# Altium PCB STC32F_Control6.25.PcbDoc
Units mil, origin at the board's own origin, x right, y up, seen from the top; angles counter-clockwise.
Board outline 3897 x 2975.69 mil, 2 copper layers (Top Layer, Bottom Layer); 76 components, 64 nets, 254 pads, 70 vias.
Unrouted connection lines stored in the file: 42.
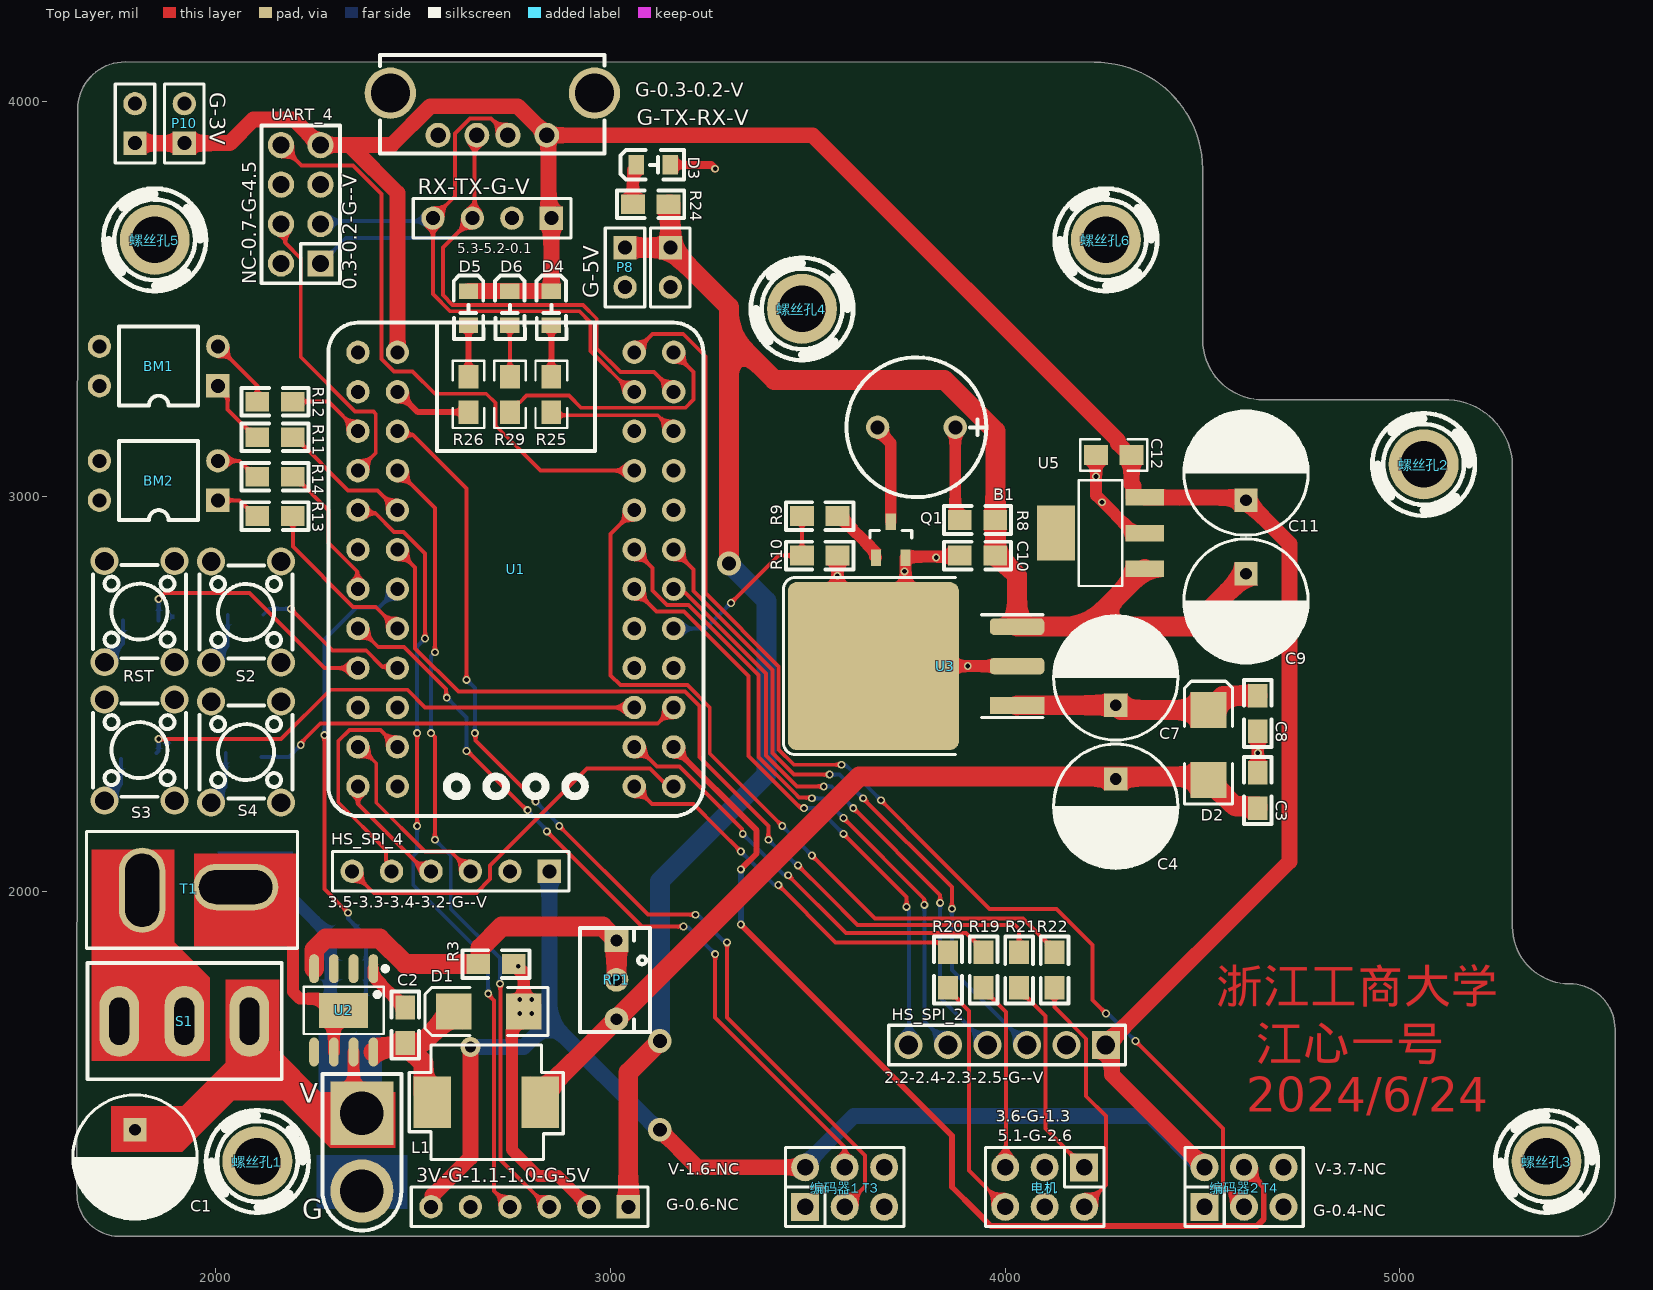
[diagram p0: Top Layer view]
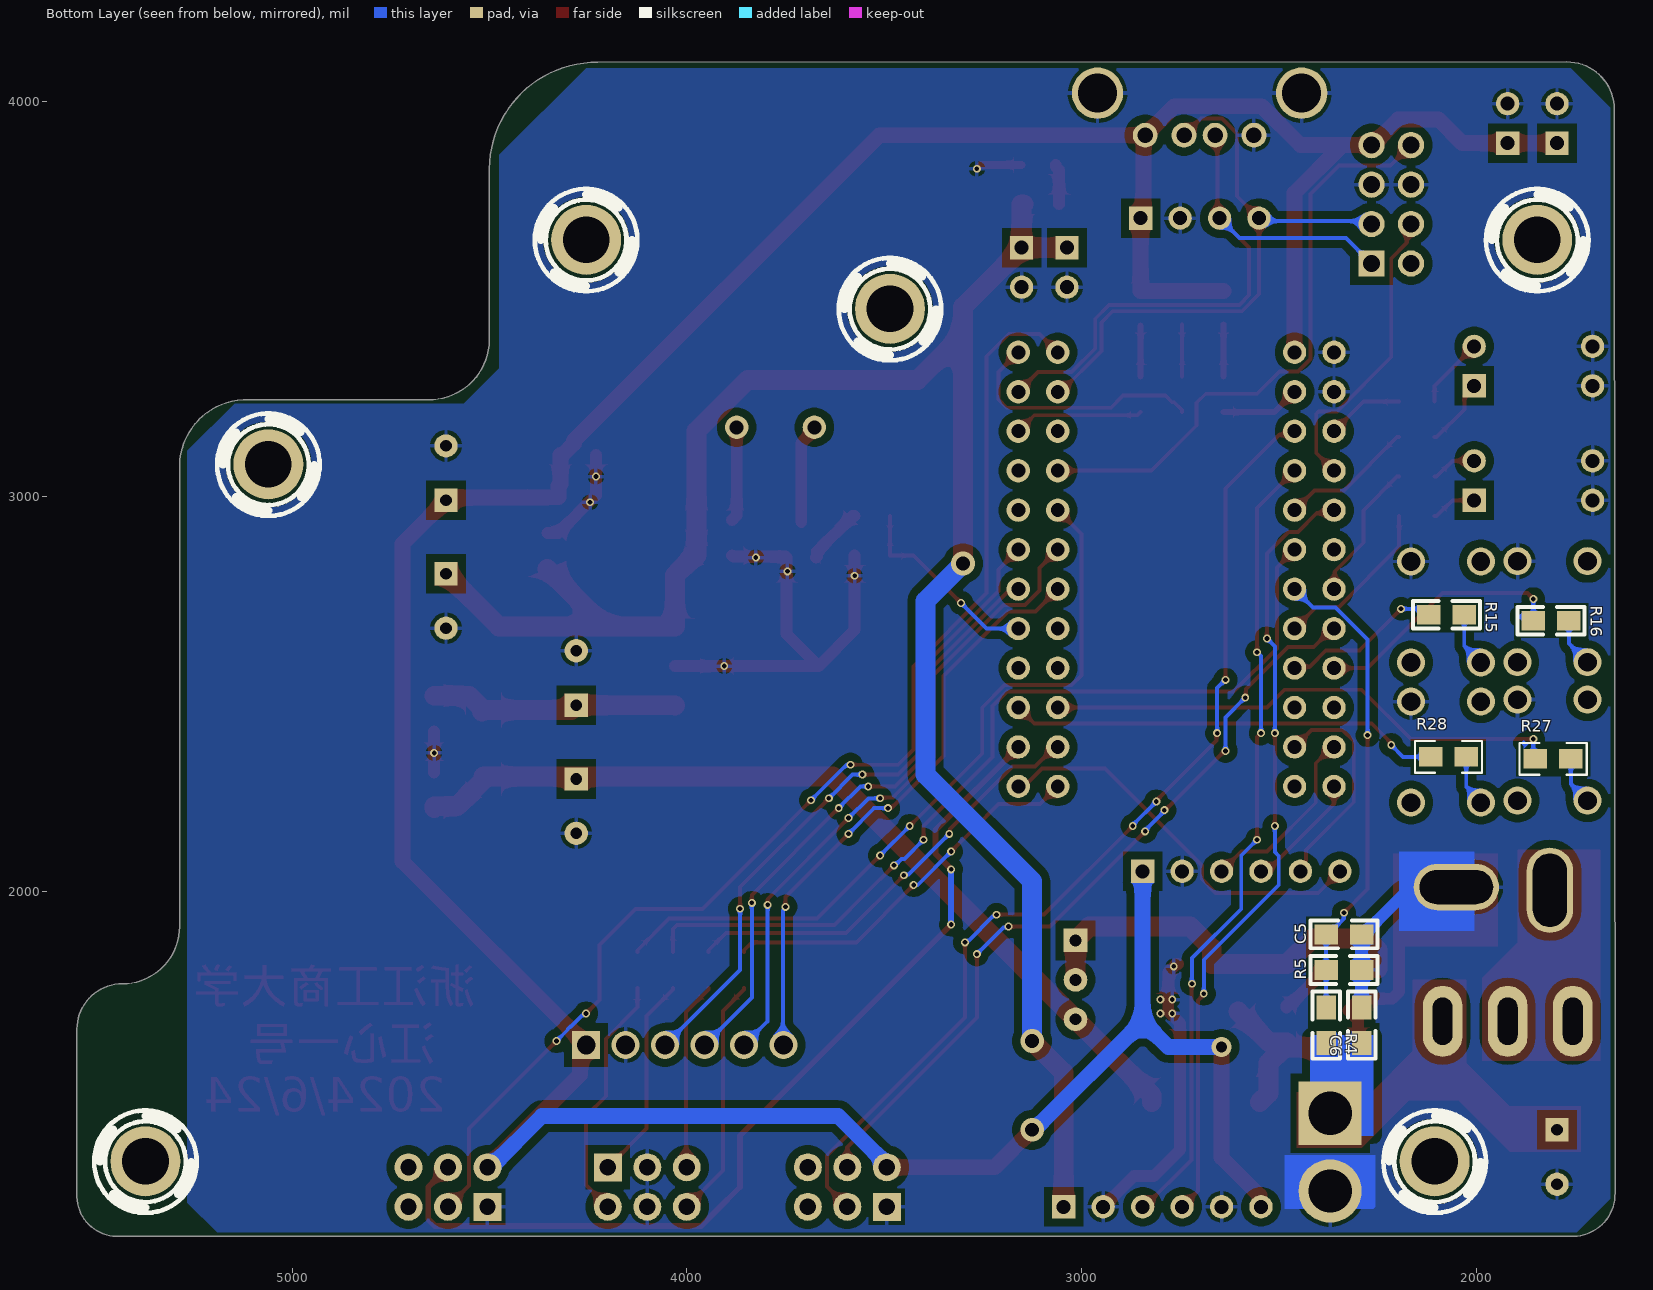
[diagram p1: Bottom Layer view, seen from below]

## Layer stack, top to bottom
Top Solder: solder mask 0.4, Solder Resist, Dk 3.5
Top Layer: signal copper 1.4
Dielectric 1: dielectric 12.6, FR-4, Dk 4.8
Bottom Layer: signal copper 1.4
Bottom Solder: solder mask 0.4, Solder Resist, Dk 3.5

## Board outline
1648,1234.93 ccw(c1755,1232.15) 1753.13,1125.13 1755,1125 5450,1125 5445,1125 ccw(c5442.5,1227.5) 5545,1225 5545,1650 ccw(c5430,1650) 5430,1765 cw(c5430,1910) 5285,1910 5285.14,1910 5285,3080 ccw(c5115,3075) 5110,3245 4655,3245 cw(c4652.5,3397.5) 4500,3395 4500,3830 ccw(c4227.5,3827.5) 4225.85,4100.01 4225,4099.63 1770,4100.69 1770,4100.59 ccw(c1769.5,3981.09) 1650,3980.59 1650.21,3980

## Design rules (kind name [scope] priority, off if disabled: settings)
Clearance [All] p1: gap=6 ignorepadtopadclearanceinfootprint=TRUE
HoleSize [All] p1: absolutevalues=TRUE maxlimit=393.7 minlimit=1 maxpercent=80.000 minpercent=20.000
PolygonConnect [All] p1: connectstyle=Relief reliefconductorwidth=10 reliefentries=4 polygonreliefangle="90 Angle" airgapwidth=10
RoutingVias [All] p1: holewidth=28 width=50 viastyle="Through Hole" minholewidth=28 minwidth=50 maxholewidth=28 maxwidth=50
SolderMaskExpansion [All] p1: expansion=4 istentingtop=FALSE
Width Width_1 [InNetClass('POWER')] p1: maxlimit=80 minlimit=10 preferedwidth=40
Width [InNetClass('POWER')] p2: maxlimit=100 minlimit=10 preferedwidth=30
29 further rules are at their usual default settings.

## Components (designator, comment, footprint, x,y, rotation, side; value= is the part's Value field where it differs from the comment)
3V-G-1.1-1.0-G-5V "Header 6" HDR1X6 3045,1200 r180 top (schematic designator P6)
B1 "BEEP" "BEEP 9x5.5mm" 3775,3175 r180 top
BM1 "SW DIP-2" BoMa2 1845,3340 r90 top
BM2 "SW DIP-2" BoMa2 1845,3050 r90 top
C1 "Cap Pol2" CAP-8X9 1795,1326.1 r270 top value=220uF
C2 "102" 0805#1 2480,1705 r270 top value=1000pF
C3 "104" 0805#1 4640,2300 r270 top value=1000pF
C4 "Cap Pol2" CAP-8X9 4280,2215 r270 top value=470uF
C5 "100nF" 0805#1 2290,1890 r0 bottom
C6 "104" 0805#1 2290,1705 r270 bottom value=1000pF
C7 "100uF 16V" CAP-8X9 4280,2540 r90 top value=100uF
C8 "100nF" 0805#1 4640,2495 r270 top
C9 "100uF 16V" CAP-8X9 4610,2735 r270 top value=100uF
C10 "100nF" 0805#1 3975,2850 r180 top
C11 "Cap Pol2" CAP-8X9 4610,3058.9 r90 top value=220uF
C12 "104" 0805#2 4275,3105 r0 top value=1000pF
D1 "SS56" SMB 2691.42,1695 r180 top
D2 "SS54" SMB 4515,2370 r90 top
D3 "LED5V" "LED 0805紫光二极管" 3105.63,3837.6 r0 top
D4 "LED5V" "LED 0805紫光二极管" 2847.6,3479.37 r270 top
D5 "LED5V" "LED 0805紫光二极管" 2637.6,3479.37 r270 top
D6 "LED5V" "LED 0805紫光二极管" 2742.6,3479.37 r270 top
G "电机供电接口" XT30 2370,1436.85 r270 top (schematic designator P1)
G-3V "3.3V" HDR1X2 1795,3895 r90 top (schematic designator P9)
G-5V "Header 2" HDR1X2 3151.61,3630 r270 top (schematic designator P7)
G-TX-RX-V "USB-231-ARY" TYPE-A 2441.97,4021.69 r0 top (schematic designator U4)
HS_SPI_2 "CON6" 6P2.54 4005,1610 r180 top
HS_SPI_4 "Header 6" HDR1X6 2845,2050 r180 top
L1 "Inductor" SMD 2685,1465 r0 top value=22mH
P8 "Header 2" HDR1X2 3036.61,3630 r270 top
P10 "3.3V" HDR1X2 1920,3895 r90 top
Q1 "S8050" S8050 3710,2885 r90 top
R3 "2K" 0805#1 2665,1815 r0 top
R4 "200K ±1%" 0805#1 2380,1615 r90 bottom value=200K
R5 "20K ±1%" 0805#1 2380,1800 r180 bottom value=20K
R8 "10R ±1%" 0805#1 3975,2940 r180 top value=10R
R9 "4.7K ±1%" 0805#1 3485,2950 r0 top value=4.7K
R10 "200K ±1%" 0805#1 3485,2850 r0 top value=200K
R11 "470R ±1%" 0805#1 2195,3150 r180 top value=470R
R12 "470R ±1%" 0805#1 2195,3240 r180 top value=470R
R13 "470R ±1%" 0805#1 2195,2950 r180 top value=470R
R14 "470R ±1%" 0805#1 2195,3050 r180 top value=470R
R15 "470R ±1%" 0805#1 2120,2700 r180 bottom value=470R
R16 "470R ±1%" 0805#1 1855,2685 r180 bottom value=470R
R19 "100R ±1%" 0805#1 3945,1845 r270 top value=100R
R20 "100R ±1%" 0805#1 3855,1845 r270 top value=100R
R21 "100R ±1%" 0805#1 4035,1755 r90 top value=100R
R22 "100R ±1%" 0805#1 4125,1755 r90 top value=100R
R24 "2K ±1%" 0805#1 3146.61,3740 r180 top value=2K
R25 "2K ±1%" 0805#2 2850,3258.39 r90 top value=2K
R26 "2K ±1%" 0805#2 2640,3258.39 r90 top value=2K
R27 "470R ±1%" 0805#2 1805,2335 r180 bottom value=470R
R28 "470R ±1%" 0805#2 2070,2340 r180 bottom value=470R
R29 "2K ±1%" 0805#2 2745,3258.39 r90 top value=2K
RP1 "10kΩ" 可调电阻10k 3015,1775 r0 top
RST "TS665CJ" 圆形按键 1895,2580 r90 top
RX-TX-G-V "Header 4" HDR1X4 2850,3705 r180 top (schematic designator P5)
S1 "ON/OFF" KAIGUAN-N 1920,1670 r180 top
S2 "TS665CJ" 圆形按键 2165,2579.11 r90 top
S3 "TS665CJ" 圆形按键 1895,2229.11 r90 top
S4 "TS665CJ" 圆形按键 2165,2224.11 r90 top
T1 "XT30插头" T插头 1813,2002 r0 top
U1 "STC32F_48P_CoreBoard" STC32F_48P 2760,2815 r0 top
U2 "TPS5430DDA" TPS5430DDA. 2350,1690 r180 top
U3 "SPX2940-5.0" SPX2940-5.0 3745.98,2565 r90 top
U5 "LM39100S-3.3" LM39100 4245,2895 r0 top
UART_4 "IDC4" 2X4P2.54 2215,3740 r90 top
电机 "Header 3X2" 2X3P2.54 4100,1250 r180 top
"编码器1 T3" "Header 3X2" 2X3P2.54 3593.15,1250 r0 top
"编码器2 T4" "Header 3X2" 2X3P2.54 4605,1250 r0 top
螺丝孔1 "Scrow" LQ_SCROW3_5mm 2105,1315 r0 top
螺丝孔2 "Scrow" LQ_SCROW3_5mm 5060,3081 r0 top
螺丝孔3 "Scrow" LQ_SCROW3_5mm 5371.46,1315 r0 top
螺丝孔4 "Scrow" LQ_SCROW3_5mm 3485,3475 r0 top
螺丝孔5 "Scrow" LQ_SCROW3_5mm 1845,3650 r0 top
螺丝孔6 "Scrow" LQ_SCROW3_5mm 4255,3650 r0 top

## Footprints (in the part's own frame and the unit in brackets; to place one, negate y for a bottom-side part, rotate by r counter-clockwise, add the part's x,y. Pads: shape width x height; smd on the part's side, far side on the other; paste and mask are expansions set on the pad)
2X3P2.54 [mm]
  rect 1.8x1.8 hole 1.05: 1(-2.54,-1.27)
  round 1.8 hole 1.05: 2(-2.54,1.27) 3(0,-1.27) 4(0,1.27) 5(2.54,-1.27) 6(2.54,1.27)
  silkscreen extent -3.81,-2.54 3.81,2.54
2X4P2.54 [mm]
  rect 1.7x1.7 hole 1.1: 1(-3.81,-1.27)
  round 1.7 hole 1.1: 2(-3.81,1.27) 3(-1.27,-1.27) 4(-1.27,1.27) 5(1.27,-1.27) 6(1.27,1.27) 7(3.81,-1.27) 8(3.81,1.27)
  silkscreen extent -5.08,-2.54 5.08,2.54
6P2.54 [mm]
  rect 1.8x1.8 hole 1.2: 1(-6.35,0)
  round 1.8 hole 1.2: 2(-3.81,0) 3(-1.27,0) 4(1.27,0) 5(3.81,0) 6(6.35,0)
  silkscreen extent -7.62,-1.27 7.62,1.27
0805#1 [mil]
  rect 60x50 smd: 1(0,0) 2(90,0)
  silkscreen extent -40,-35 130,35
0805#2 [mil]
  rect 60x50 smd: 1(-45,0) 2(45,0)
  silkscreen extent -85,-40 85,40
"BEEP 9x5.5mm" [mm] "蜂鸣器 9x5.5mm"
  round 1.5 hole 0.9: 1(-2.5,0) 2(2.5,0)
  silkscreen extent -4.5,-4.5 4.5,4.5, body extent -4.8,-4.8 4.8,4.8, height 5.05
BoMa2 [mm]
  rect 1.5x1.5 hole 0.9: 1(-1.524,-4.064)
  round 1.5 hole 0.9: 2(1.016,-4.064) 3(1.016,3.556) 4(-1.524,3.556)
  silkscreen extent -2.79,-2.79 2.29,2.29, body extent -3.52,-5.2 3.02,4.7, height 6.8
CAP-8X9 [mm]
  rect 1.5x1.5 hole 0.75: 1(-1.75,0)
  round 1.5 hole 0.75: 2(1.75,0)
  silkscreen extent -4,-4 4,4, body extent -4,-3.99 4,3.99, height 9.8
HDR1X2 [mm] "Connector; Header; 2 Position"
  rect 1.5x1.5 hole 0.9: 1(0,0)
  round 1.5 hole 0.9: 2(2.54,0)
  silkscreen extent -1.27,-1.27 3.81,1.27
HDR1X4 [mm] "Connector; Header; 4 Position"
  rect 1.5x1.5 hole 0.9: 1(0,0)
  round 1.5 hole 0.9: 2(2.54,0) 3(5.08,0) 4(7.62,0)
  silkscreen extent -1.27,-1.27 8.89,1.27
HDR1X6 [mm] "Connector; Header; 6 Position"
  rect 1.5x1.5 hole 0.9: 1(0,0)
  round 1.5 hole 0.9: 2(2.54,0) 3(5.08,0) 4(7.62,0) 5(10.16,0) 6(12.7,0)
  silkscreen extent -1.27,-1.27 13.97,1.27
KAIGUAN-N [mil]
  oval 100x180 hole 120 slot 50 at 0 deg: 1(-165,0) 2(0,0) 3(165,0)
  silkscreen extent -247,-148 245,147
"LED 0805紫光二极管" [mm]
  rect 1x1.25 smd: 1(-1.032,0.061) 2(1.168,0.061)
  silkscreen extent -2.03,-0.89 2.05,1.02
LM39100 [mm]
  rect 2.465x1.05 smd: 1(2.756,-1.998) 2(2.756,0.302) 3(2.756,2.602)
  rect 2.465x3.54 smd: 4(-2.959,0.302)
  silkscreen extent -1.5,-3.1 1.3,3.7
LQ_SCROW3_5mm [mm]
  round 4.5 hole 3: 1(0,0)
  silkscreen extent -3.3,-3.3 3.3,3.3, body extent -3,-3 3,3, height 1.3
S8050 [mm]
  rect 1.05x0.65 smd: 1(-1.023,0.95) 2(-1.023,-0.95) 3(1.277,0)
  silkscreen extent 0.25,-1.35 0.71,1.35, body extent -1.27,-1.45 1.53,1.45, height 1.2
SMB [mm] "DO-214-AA/SMB; 2 C-Bend Leads; Body 5.3 x 3.6 mm, inc. leads (LxW)"
  rect 2.3x2.3 smd: 1(-2.25,0) 2(2.25,0)
  silkscreen extent -3.8,-1.55 4.1,1.55
SMD [mm] "DO-214-AB/SMC; 2 C-Bend Leads; Body 7.9 x 5.9 mm, inc. leads (LxW)"
  rect 2.4x3.3 smd: 1(-3.475,0) 2(3.475,0)
  silkscreen extent -4.95,-3.68 4.95,3.68
SPX2940-5.0 [mm]
  rect 1.07x3.5 smd: 1(-2.413,-7.214)
  rrect10% 10.8x11 smd: 2(0.127,2.032)
  rrect50% 1.07x3.5 smd: 2(0.127,-7.214) 3(2.667,-7.214)
  silkscreen extent -5.57,-8.87 5.83,7.82, body extent -4.95,-7.98 5.21,6.25, height 4.87
STC32F_48P [mm] "核心板"
  round 1.5 hole 0.9: 1(-10.16,13.97) 2(-7.62,13.97) 3(-10.16,11.43) 4(-7.62,11.43) 5(-10.16,8.89) 6(-7.62,8.89) 7(-10.16,6.35) 8(-7.62,6.35) 9(-10.16,3.81) 10(-7.62,3.81) 11(-10.16,1.27) 12(-7.62,1.27) 13(-10.16,-1.27) 14(-7.62,-1.27) 15(-10.16,-3.81) 16(-7.62,-3.81) 17(-10.16,-6.35) 18(-7.62,-6.35) 19(-10.16,-8.89) 20(-7.62,-8.89) 21(-10.16,-11.43) 22(-7.62,-11.43) 23(-10.16,-13.97) 24(-7.62,-13.97) 25(7.62,-13.97) 26(10.16,-13.97) 27(7.62,-11.43) 28(10.16,-11.43) 29(7.62,-8.89) 30(10.16,-8.89) 31(7.62,-6.35) 32(10.16,-6.35) 33(7.62,-3.81) 34(10.16,-3.81) 35(7.62,-1.27) 36(10.16,-1.27) 37(7.62,1.27) 38(10.16,1.27) 39(7.62,3.81) 40(10.16,3.81) 41(7.62,6.35) 42(10.16,6.35) 43(7.62,8.89) 44(10.16,8.89) 45(7.62,11.43) 46(10.16,11.43) 47(7.62,13.97) 48(10.16,13.97)
  silkscreen extent -12.06,-15.88 12.06,15.88
TPS5430DDA. [mm]
  oval 0.63x1.865 smd: 1(-1.242,-2.878) 2(0.028,-2.878) 3(1.298,-2.878) 4(2.568,-2.878) 5(2.568,2.487) 6(1.298,2.487) 7(0.028,2.487) 8(-1.242,2.487)
  rect 3.15x2.26 smd: 9(0.663,-0.195)
  silkscreen extent -2.16,-3.03 3.24,1.33
TYPE-A [mm]
  round 1.6 hole 1: 1(10.07,-2.71) 2(7.57,-2.71) 3(5.57,-2.71) 4(3.07,-2.71)
  round 3.3 hole 2.5: 5(13.14,0) 6(0,0)
  silkscreen extent -0.67,-3.89 13.79,2.46
T插头 [mil]
  oval 118x216 hole 86 slot 186 at 90 deg: 1(0,0)
  oval 216x118 hole 86 slot 186 at 0 deg: 2(237,8)
  silkscreen extent -141,-147 394,149
XT30 [mil]
  rect 160x160 hole 110: 1(0,0)
  round 160 hole 110: 2(196.85,0)
  silkscreen extent -100,-100 297,100
可调电阻10k [mil]
  rect 60x60 hole 30: 1(0,100)
  round 60 hole 30: 2(0,0) 3(0,-100)
  silkscreen extent -92,-132 85,131
圆形按键 [mm]
  round 1.8 hole 1.2: 1(0,4.5) 2(6.5,4.5) 3(0,0) 4(6.5,0)
  silkscreen extent 0.25,-0.75 6.25,5.25

## Part data
3V-G-1.1-1.0-G-5V HS_SPI_4: "Header, 6-Pin", LatestRevisionDate=17-Jul-2002, LatestRevisionNote="Re-released for DXP Platform.", Publisher="Altium Limited"
B1: "蜂鸣器"
BM1 BM2: library part "Code SW-2", "2位拨码开关", Price(RMB)=0.000, Published=24-Mar-1999, Publisher="Altium Limited", Revision="July-2002: Re-released for DXP Platform."
C1 C4 C11: "Polarized Capacitor (Axial)", LatestRevisionDate=17-Jul-2002, LatestRevisionNote="Re-released for DXP Platform.", PackageDescription="Polarized Capacitor; 2 Leads", PackageReference=POLAR0.8, Published=8-Jun-2000, Publisher="Altium Limited"
C2 C3 C6 C12: library part "Cap Semi", "Capacitor (Semiconductor SIM Model)", LatestRevisionDate=29-May-2009, LatestRevisionNote="IPC-7351 Footprint Added.", PackageDescription="Chip Capacitor", PackageReference=C1206, Published=8-Jun-2000, Publisher="Altium Limited"
C5 C8 C10: library part Correction_Cap, "校准电容"
C7 C9: library part Cap-Elect-100uF, "Polarized Capacitor (Radial)", Voltage=16V, Price(RMB)=0.000, Published=8-Jun-2000, Publisher="Altium Limited", Revision="July-2002: Re-released for DXP Platform."
D1 D2: library part Diode, "Default Diode", Code_JEDEC=DO-214-AB, LatestRevisionDate=17-Jul-2002, LatestRevisionNote="Re-released for DXP Platform.", PackageDescription="DO-214-AB/SMC; 2 C-Bend Leads; Body 7.9 x 5.9 mm, inc. leads (LxW)", PackageReference=SMC, PackageVersion=Sep-1996, Published=8-Jun-2000, Publisher="Altium Limited"
D3 D4 D5 D6: library part LED
G: library part "KF/WJ/DG 30x", "接线端子 2Pin"
G-3V P10: library part "Header 2", "Header, 2-Pin", LatestRevisionDate=17-Jul-2002, LatestRevisionNote="Re-released for DXP Platform.", Publisher="Altium Limited"
G-5V P8: "Header, 2-Pin", LatestRevisionDate=17-Jul-2002, LatestRevisionNote="Re-released for DXP Platform.", Publisher="Altium Limited"
Q1: library part "NPN S8050", "Discrete NPN Bipolar Transistor", PartNumber=S8050, Price(RMB)=0.000, Published=8-Jun-2000, Publisher="Altium Limited", Revision="July-2002: Re-released for DXP Platform."
R3: library part Res2, "Resistor", LatestRevisionDate=17-Jul-2002, LatestRevisionNote="Re-released for DXP Platform.", PackageDescription="Axial Device, Thru-Hole; 2 Leads; 0.4 in Pin Spacing", PackageReference=AXIAL-0.4, Published=8-Jun-2000, Publisher="Altium Limited"
R4 R5 R8 R9 R10 R11 R12 R13 R14 R15 R16 R19 R20 R21 R22 R24 R27 R28: library part Res-Chip, "贴片电阻", Tolerance=±1%, Price(RMB)=0.000, Published=8-Jun-2000, Publisher="Altium Limited", Revision="July-2002: Re-released for DXP Platform."
R25 R26 R29: library part Res-Chip_4, "贴片电阻", Power=1/8W, Tolerance=±1%, Revision=V1.0
RP1: BOM_JLCPCB Part Class="Extended Part", BOM_Manufacturer=BOURNS, BOM_Manufacturer Part=3266Y-1-103LF, BOM_Supplier=LCSC, BOM_Supplier Part=C719182, Contributor=LCSC, nameAlias=Resistance, spicePre=R, spiceSymbolName=3266Y-1-103LF
RST S2 S3 S4: Contact Current=50mA, JLCPCB Part Class="Extended Part", LCSC Part Name="6*6*5mm 直插 轻触开关", Manufacturer="SHOU HAN(首韩)", Voltage Rating (DC)=12V, Actuator Style=圆形按钮, Add into BOM=yes, Circuit=单刀单掷, Convert to PCB=yes, Datasheet=https://atta.szlcsc.com/upload/public/pdf/source/20190521/C393938_BDABEAC600B4C55E200A80AA129B70BC.pdf, Device=TS665CJ, Manufacturer Part=TS665CJ, Mechanical Life=-, Mounting Style=直插, Supplier=LCSC, Supplier Footprint=插件, Supplier Part=C393938, Switch Height=5mm, Switch Length=6mm, Switch Width=6mm, Symbol=TS665CJ, With Lamp=-
RX-TX-G-V: "Header, 4-Pin", LatestRevisionDate=17-Jul-2002, LatestRevisionNote="Re-released for DXP Platform.", Publisher="Altium Limited"
S1: library part SW-SPDT, "单刀双掷开关 3脚船型、钮子、拨动开关 SPDT Subminiature Toggle Switch", Price(RMB)=0.000, Published=24-Mar-1999, Publisher="Altium Limited"
T1: library part T型插头
U1: "逐飞科技STC32F核心板"
U2: BOM_JLCPCB Part Class="Extended Part", BOM_Manufacturer=TI(德州仪器), BOM_Manufacturer Part=TPS5430DDA, BOM_Supplier=LCSC, BOM_Supplier Part=C502477, Contributor=lcsc, spicePre=U, spiceSymbolName=TPS5430DDA
U3: "SPX2940-5.0 5V LDO TO-263-3"
U5: BOM_JLCPCB Part Class="Extended Part", BOM_Manufacturer=HTC, BOM_Manufacturer Part=LM39100S-3.3, BOM_Supplier=LCSC, BOM_Supplier Part=C126055, Contributor=LCSC, spicePre=U, spiceSymbolName=LM39100S-3.3
电机 "编码器1 T3" "编码器2 T4": "Header, 3-Pin, Dual row", LatestRevisionDate=17-Jul-2002, LatestRevisionNote="Re-released for DXP Platform.", Publisher="Altium Limited"
G-TX-RX-V: Designer=U?, Device=USB-231-ARY, Symbol=USB-231-ARY
L1: Code_IEC=1005, Code_JEITA=0402, LatestRevisionDate=29-May-2009, LatestRevisionNote="IPC-7351 Footprint Added.", PackageDescription="Chip Inductor", PackageReference=0402-A, Published=8-Jun-2000, Publisher="Altium Limited"

## Via types
v1: diameter 20, hole 12.01, Top Layer to Bottom Layer, 66 vias
v2: diameter 60, hole 35, Top Layer to Bottom Layer, 3 vias
v3: diameter 50, hole 28, Top Layer to Bottom Layer, 1 vias

## Nets (pads, with @x,y where several pads share a name; then routed paths per layer and width w, separated by ;. In a path a pad name is that pad's centre, name@x,y a point inside that pad or via, vN(x,y) a via of type N, cw(c..) or ccw(c..) an arc to the next point about the centre after c; other vN are vias at no path point)
0.1: R25.1 U1.44 | length 330
  Top Layer w10: R25.1 2857.86,3205.53 3119.47,3205.53 U1.44
0.2: G-TX-RX-V.2 RX-TX-G-V.4 U1.45 UART_4.3 | length 1544.1
  Top Layer w10: G-TX-RX-V.2 2697.51,3957.49 2643.66,3957.49 2605.34,3919.17 2605.34,3760.34 RX-TX-G-V.4 2550,3512.37 2593.37,3469 2921,3469 2949,3441 2949,3368.37 3052.37,3265 U1.45
  Bottom Layer w10: UART_4.3 2272.5,3697.5 2542.5,3697.5 RX-TX-G-V.4
0.3: G-TX-RX-V.3 RX-TX-G-V.3 U1.46 UART_4.1 | length 1603.8
  Top Layer w10: G-TX-RX-V.3 2655.63,3909.37 2655.63,3710.63 2575,3630 2575,3510 2600,3485 2930,3485 2965,3450 2965,3375 3025,3315 3110,3315 U1.46
  Bottom Layer w10: UART_4.1 2330,3655 2600,3655 RX-TX-G-V.3
0.4: "编码器2 T4.3" U1.47 | length 3122
  Top Layer w10: U1.47 3105.86,3410.86 3184.14,3410.86 3240,3355 3240,2755 3426,2569 3426,2359 3465,2320 v1(3585,2320) ; v1(3685,2230) 3818.46,2096.54 3960,1955 4130,1955 4221.54,1863.46 4221.54,1723.46 v1(4255,1690) ; v1(4330,1620) 4551.43,1398.57 4551.43,1253.57 4605,1200
  Bottom Layer w10: v1(3585,2320) 3595,2320 v1(3685,2230) ; v1(4255,1690) 4257.71,1690 4262.71,1685 4265,1685 4293.57,1656.43 4294.99,1656.43 4301.43,1649.99 4301.43,1648.57 v1(4330,1620)
0.5: R12.1 U1.5 | length 196.1
  Top Layer w10: R12.1 2285,3240 U1.5
0.6: "编码器1 T3.3" U1.6 | length 2571
  Top Layer w10: U1.6 2469.39,3155.61 2499.39,3155.61 2635,3020 v1(2635,2535) ; v1(2656,2400) 2656,2397.29 2657.91,2395.38 2657.91,2381.58 2810.11,2229.39 v1(2810.11,2227.04) ; v1(2870,2165) 3095,1940 v1(3215,1940) ; v1(3295,1870) 3295,1680 3645,1330 3645,1251.85 3593.15,1200
  Bottom Layer w10: v1(2635,2535) 2656,2514 v1(2656,2400) ; v1(2810.11,2227.04) 2870,2167.15 v1(2870,2165) ; v1(3215,1940) 3217.71,1940 3222.71,1935 3225,1935 3285,1875 3287.29,1875 3292.29,1870 v1(3295,1870)
0.7: U1.7 UART_4.4 | length 770.3
  Top Layer w10: UART_4.4 2175.89,3679.11 2175.89,3641.99 2215,3602.88 2215,3352.69 2352.69,3215 2399.14,3215 2405,3209.14 2405,3110 U1.7
1.0: 3V-G-1.1-1.0-G-5V.3 U1.8 | length 2035.7
  Top Layer w10: U1.8 2555,2970 v1(2555,2605) ; v1(2545,2400) 2555,2390 v1(2555,2130) ; v1(2720,1765) 2721,1764 2721,1319 2840,1200 3V-G-1.1-1.0-G-5V.3
  Bottom Layer w10: v1(2545,2400) 2545,2595 v1(2555,2605) ; v1(2555,2130) 2595,2090 2595,1955 2720,1830 v1(2720,1765)
1.1: 3V-G-1.1-1.0-G-5V.4 U1.9 | length 1984.5
  Top Layer w10: U1.9 2367.89,2957.11 2404.53,2957.11 2451.64,2910 2475,2910 2530,2855 v1(2530,2640) ; v1(2510,2165) v1(2510,2400) ; v1(2690,1740) 2690,1737.29 2705,1722.29 2705,1240 3V-G-1.1-1.0-G-5V.4
  Bottom Layer w10: v1(2510,2165) 2510,2098.65 2500,2088.65 2500,2015 2690,1825 v1(2690,1740) ; v1(2510,2400) 2510,2620 v1(2530,2640)
1.3: R21.2 U1.12 | length 2248.2
  Top Layer w10: U1.12 2505,2820 2505,2615 2614.47,2505.53 3188.37,2505.53 3225,2468.9 3225,2340 3400,2165 v1(3400,2130) ; v1(3475,2065) 3546.46,1993.54 3626,1914 4025.14,1914 4035,1904.14 R21.2
  Bottom Layer w10: v1(3400,2130) 3448.79,2081.21 3456.08,2081.21 3472.29,2065 v1(3475,2065)
1.4: R14.1 U1.13 | length 356.3
  Top Layer w10: R14.1 2200,3050 2285.31,2964.69 2285.31,2882.38 2358.16,2809.53 2358.16,2766.84 U1.13
1.5: C5.2 R4.2 R5.1 U1.14 | length 1216.6
  Top Layer w10: v1(2275,2395) 2275,2005 v1(2335,1945)
  Bottom Layer w10: v1(2275,2395) 2275,2637.31 2356.39,2718.7 2413.7,2718.7 U1.14 ; v1(2335,1945) 2335,1930 2375,1890 C5.2 R5.1 R4.2
1.6: "编码器1 T3.4" U1.15 | length 1987.3
  Top Layer w10: U1.15 2365,2665 2411.3,2618.7 2476.3,2618.7 2583.09,2511.91 2583.09,2491.91 v1(2585,2490) ; v1(2635,2355) 2637.5,2355 2787.5,2205 v1(2790,2205) ; v1(2838.45,2151.26) 3079.71,1910 v1(3185,1910) ; v1(3265,1840) 3265,1680 3593.15,1351.85 3593.15,1300
  Bottom Layer w10: v1(2585,2490) 2635,2440 v1(2635,2355) ; v1(2790,2205) 2790,2202.35 2838.45,2153.91 v1(2838.45,2151.26) ; v1(3185,1910) 3186.91,1908.09 3196.91,1908.09 v1(3265,1840)
1.7: R13.1 U1.16 | length 428.3
  Top Layer w10: R13.1 2195,2872.69 2347.69,2720 2405,2720 U1.16
2.1: R9.1 R10.1 U1.34 | length 501.6
  Top Layer w10: v1(3305,2730) 3425,2850 R10.1 R9.1
  Bottom Layer w10: U1.34 3240,2665 v1(3305,2730)
2.2: HS_SPI_2.6 U1.35 | length 1510.4
  Top Layer w10: U1.35 3116.53,2708.47 3186.53,2708.47 3350,2545 3350,2342.12 3480.2,2211.91 3488.09,2211.91 v1(3490,2210) ; v1(3590,2145) 3750,1985 v1(3750,1960)
  Bottom Layer w10: v1(3490,2210) 3525,2210 v1(3590,2145) ; v1(3750,1960) 3750,1957.29 3756.67,1950.62 3756.67,1611.67 HS_SPI_2.6
2.3: HS_SPI_2.4 U1.36 | length 1547.3
  Top Layer w10: U1.36 3169.39,2755.61 3189.39,2755.61 3394,2551 3394,2343.37 3472.37,2265 v1(3540,2265) ; v1(3615,2210) 3835,1990 v1(3835,1970)
  Bottom Layer w10: v1(3540,2265) 3560,2265 v1(3615,2210) ; v1(3835,1970) 3835,1730 HS_SPI_2.4
2.4: HS_SPI_2.5 U1.37 | length 1651.6
  Top Layer w10: U1.37 3106.3,2818.7 3106.3,2761.39 3143.21,2724.47 3197.9,2724.47 3375,2547.37 3375,2339.75 3465.75,2249 3477.83,2236.91 3508.09,2236.91 v1(3510,2235) ; v1(3590,2185) 3794.82,1980.18 3794.82,1965.18 v1(3795,1965)
  Bottom Layer w10: v1(3510,2235) 3540,2235 v1(3590,2185) ; v1(3795,1965) 3795,1670 HS_SPI_2.5
2.5: HS_SPI_2.3 U1.38 | length 1693.1
  Top Layer w10: U1.38 3210,2815 3210,2760 3410,2560 3410,2350 3465,2295 v1(3555,2295) ; v1(3640,2235) 3865,2010 v1(3865,1955)
  Bottom Layer w10: v1(3555,2295) 3580,2295 v1(3640,2235) ; v1(3865,1955) 3865,1800 HS_SPI_2.3
2.6: R22.2 U1.39 | length 1930.1
  Top Layer w10: U1.39 3000,2905 3000,2546.53 3025,2521.53 3195,2521.53 3251.31,2465.21 3251.31,2348.69 3348.39,2251.61 v1(3435,2165) ; v1(3510,2090) 3670,1930 4045,1930 4125,1850 R22.2
  Bottom Layer w10: v1(3435,2165) v1(3510,2090)
3.2: HS_SPI_4.3 U1.21 | length 474.1
  Top Layer w10: U1.21 2365,2365 2406.3,2323.7 2406.3,2223.7 2530,2100 2595,2100 HS_SPI_4.3
3.3: HS_SPI_4.5 U1.22 | length 565.7
  Top Layer w10: HS_SPI_4.5 2445,2063.27 2431.01,2077.26 2431.01,2103.99 2310,2225 2310,2380 2338.47,2408.47 2416.53,2408.47 U1.22
3.4: HS_SPI_4.4 U1.23 | length 300.4
  Top Layer w10: U1.23 2360,2220 2520.61,2059.39 2535.61,2059.39 HS_SPI_4.4
3.5: HS_SPI_4.6 U1.26 | length 1007.4
  Top Layer w10: HS_SPI_4.6 2400,1995 2660,1995 2695,2030 2695,2065 2830,2200 2940,2310 3100,2310 3131.01,2278.99 3132.74,2278.99 3146.73,2265 U1.26
3.6: R19.1 U1.27 | length 1109.2
  Top Layer w10: U1.27 3067.63,2365 3117.63,2315 3175,2315 3333.09,2156.91 3333.09,2146.91 v1(3335,2145) ; v1(3450,2040) 3596,1894 3901,1894 3945,1850 R19.1
  Bottom Layer w10: v1(3335,2145) 3438.09,2041.91 3448.09,2041.91 v1(3450,2040)
3.7: "编码器2 T4.4" U1.28 | length 2430.4
  Top Layer w15: U1.28 3160,2363.84 3370,2153.84 3370,2095 v1(3330,2055) ; v1(3330,1915) 3865,1380 3865,1250 3925,1190 3963.93,1151.07 4637.28,1151.07 4655,1168.79 4655,1250 4605,1300
  Bottom Layer w15: v1(3330,1915) v1(3330,2055)
4.0: R15.1 U1.18 | length 408.3
  Top Layer w10: v1(2190,2715) 2295,2610 2380,2610 2421.33,2568.67 2456.33,2568.67 U1.18
  Bottom Layer w10: R15.1 2135,2715 v1(2190,2715)
4.1: R27.1 U1.29 | length 1312.5
  Top Layer w10: v1(1855,2385) 2165,2385 2290,2510 2485,2510 2530,2465 U1.29
  Bottom Layer w10: R27.1@1850,2350 1855,2355 v1(1855,2385)
4.2: R28.1 U1.30 | length 1094.7
  Top Layer w10: v1@2215,2375 2264.47,2424.47 3119.47,2424.47 U1.30
  Bottom Layer w10: R28.1 2185,2340 v1(2215,2370)
4.5: U1.41 UART_4.8 | length 1514.7
  Top Layer w10: UART_4.8 2216.92,3838.08 2346.92,3838.08 2419.47,3765.53 2419.47,3348.21 2451.08,3316.61 2498.39,3316.61 2555,3260 2685,3260 2709,3236 2709,3178.83 2822.83,3065 U1.41
4.7: R11.1 U1.10 | length 341.6
  Top Layer w10: R11.1 2200,3150 2335,3015 2410,3015 U1.10
5.1: R20.1 U1.25 | length 971.9
  Top Layer w10: U1.25 3105,2220 3210,2220 3271.54,2158.46 v1(3330,2100) ; v1(3425,2015) 3570,1870 3835,1870 3855,1850 R20.1
  Bottom Layer w10: v1(3330,2100) 3414.74,2015.26 3424.74,2015.26 v1(3425,2015)
5.2: R29.1 U1.48 | length 647
  Top Layer w10: R29.1 2745,3218.39 2765,3238.39 2770,3238.39 2786.61,3255 2895,3255 2925.53,3224.47 3189.47,3224.47 3210,3245 3210,3315 U1.48
5.3: R26.1 U1.4 | length 201.4
  Top Layer w15: U1.4 2511.61,3213.39 R26.1
GND: 3V-G-1.1-1.0-G-5V.2 3V-G-1.1-1.0-G-5V.5 "编码器1 T3.1" "编码器2 T4.1" BM1.3 BM1.4 BM2.3 BM2.4 C1.2 C3.1 C4.2 C5.1 C6.1 C7.2 C8.2 C9.2 C10.2 C11.2 C12.1 D1.1 D3.2 G-3V.2 G-5V.2 G-TX-RX-V.4 G-TX-RX-V.5 G-TX-RX-V.6 G.2 HS_SPI_2.2 HS_SPI_4.2 P8.2 P10.2 Q1.2 R3.2 R5.2 R10.2 RST.4 RX-TX-G-V.2 S2.4 S3.4 S4.4 T1.2 U1.1 U1.3 U2.6 U2.9 U3.2 U5.2 UART_4.5 UART_4.6 电机.3 电机.4 | length 3433.4
  Top Layer w20: D3.2 3255,3840 v1(3265,3830)
  Top Layer w30: T1.2 2195,1865 2195,1744.74 2212.57,1727.17 2294.39,1727.17 U2.9 2298.88,1672.68 U2.6 ; R3.2 2760,1815 2780,1795 2780,1725 D1.1 2750,1665 2750,1345 2817.22,1277.78 2867.22,1277.78 3V-G-1.1-1.0-G-5V.2 ; R10.2 3575,2660.98 U3.2@3665.98,2570 ; C10.2 3882.36,2847.36 3749.61,2847.36 3747.4,2845.16 Q1.2 3747.4,2651.42 U3.2@3665.98,2570 ; U3.2@4030,2570 v1(3905,2570) U3.2@3665.98,2570 ; C12.1 4230,3002.58 4325.67,2906.91 U5.2 ; C3.1 C8.2
  Bottom Layer w30: T1.2 2066.84,1993.16 2181.84,1993.16 2285,1890 C5.1 R5.2 C6.1
  other v1: 2770,1690 2800,1690 2770,1725 2800,1725 2766.2,1809.1 4640,2350 3574.56,2798.86 3745,2810 3825,2845 4245,2985 4230,3050
NetB1_1: B1.1 R8.2 | length 239.8
  Top Layer w30: B1.1 3873.43,2951.57 R8.2
NetB1_2: B1.2 Q1.3 | length 253.6
  Top Layer w30: B1.2 3676.57,3168.27 3710,3134.85 Q1.3
NetBM1_1: BM1.1 R11.2 | length 174.4
  Top Layer w10: BM1.1 2029.53,3255.47 2029.53,3220.47 2100,3150 R11.2
NetBM1_2: BM1.2 R12.2 | length 181.4
  Top Layer w10: BM1.2 2105,3280 R12.2
NetBM2_1: BM2.1 R13.2 | length 116.6
  Top Layer w10: BM2.1 2060,2990 2100,2950 R13.2
NetBM2_2: BM2.2 R14.2 | length 116.6
  Top Layer w10: BM2.2 2060,3090 2100,3050 R14.2
NetC2_1: C2.1 U2.1 | length 136
  Top Layer w30: U2.1 2398.88,1784.17 2463.05,1720 2470,1720 2480,1710 C2.1
NetC2_2: C2.2 D1.2 L1.1 U2.8 | length 423.8
  Top Layer w50: U2.8 2410.59,1603.78 2473.78,1603.78 C2.2@2480,1610 ; L1.1 2525.94,1487.24 2525.94,1564.06 C2.2@2480,1610 ; D1.2 2524.63,1616.79 2480,1616.79 C2.2 C2.2@2480,1610
NetC7_1: C7.1 C8.1 D2.2 U3.1 | length 637.9
  Top Layer w50: U3.1 4030.55,2470.55 4279.45,2470.55 C7.1 4292.52,2458.58 D2.2 4518.58,2455 4518.58,2462.17 4551.42,2495 C8.1
NetD3_1: D3.1 R24.2 | length 103.5
  Top Layer w30: R24.2 3056.61,3826.69 3065,3835.08 D3.1
NetD4_2: D4.2 R25.2 | length 130
  Top Layer w15: R25.2 D4.2
NetD5_2: D5.2 R26.2 | length 132.7
  Top Layer w15: R26.2 D5.2@2640,3436.06
NetD6_2: D6.2 R29.2 | length 131.6
  Top Layer w10: R29.2 D6.2 D6.2@2745,3435
NetQ1_1: Q1.1 R9.2 | length 148.6
  Top Layer w30: R9.2 3580,2950 3670.39,2859.61 3670.39,2846.93 Q1.1
NetR3_1: R3.1 RP1.1 RP1.2 U2.4 | length 1035.3
  Top Layer w50: U2.4 2248.88,1850.71 2278.17,1880 2415,1880 2480,1815 R3.1@2670,1815 ; R3.1 R3.1@2670,1815 ; RP1.2 RP1.1 2980,1910 2724.29,1910 2670,1855.71 R3.1@2670,1815
NetR15_2: R15.2 S2.1 | length 138.4
  Bottom Layer w10: S2.1 2030,2621.26 R15.2
NetR16_2: R16.2 RST.1 | length 124.5
  Bottom Layer w10: RST.1 1765,2627.15 R16.2
NetR19_2: R19.2 电机.5 | length 479
  Top Layer w10: R19.2 3945,1750 4001.43,1693.57 4001.43,1301.43 电机.5
NetR20_2: R20.2 电机.6 | length 615.1
  Top Layer w10: R20.2 3855,1750 3908.57,1696.43 3908.57,1291.43 电机.6
NetR21_1: R21.1 电机.1 | length 523.3
  Top Layer w10: R21.1 4035,1750 4055,1730 4101.43,1683.57 4101.43,1398.57 电机.1
NetR22_1: R22.1 电机.2 | length 631.6
  Top Layer w10: R22.1 4125,1705.67 4205,1625.67 4205,1480 4255,1430 4255,1255 电机.2
NetR27_2: R27.2 S3.1 | length 123.4
  Bottom Layer w10: S3.1 1760,2271.26 R27.2
NetR28_2: R28.2 S4.1 | length 141.3
  Bottom Layer w10: S4.1 1987.85,2227.85 2025,2265 R28.2@2025,2350
NetS1_2: S1.2 S1.3 T1.1 | length 521
  Top Layer w100: T1.1 1813,1768 1755,1710 S1.3 S1.2
RST: R16.1 U1.17 | length 644.9
  Top Layer w10: v1(1855,2740) 1870,2755 2085,2755 2275,2565 U1.17
  Bottom Layer w10: R16.1 v1(1855,2740)
VCC3.3V: 3V-G-1.1-1.0-G-5V.6 "编码器1 T3.2" "编码器2 T4.2" C11.1 C12.2 D4.1 D5.1 D6.1 G-3V.1 G-TX-RX-V.1 HS_SPI_2.1 HS_SPI_4.1 P10.1 RX-TX-G-V.1 U1.2 U5.3 UART_4.7 | length 9572.3
  Top Layer w40: G-3V.1 P10.1 2035,3895 2095,3955 2197.82,3955 2262.82,3890 UART_4.7 2343.99,3890 2445,3890 2543.49,3988.49 2764.93,3988.49 G-TX-RX-V.1 ; 2343.99,3884.85 2460,3768.84 U1.2 ; 3V-G-1.1-1.0-G-5V.6 2548.65,1203.65 2548.65,1228.65 2645,1325 v3(2645,1604.72) ; D5.1 D6.1 D4.1 RX-TX-G-V.1 2842.83,3712.17 2842.83,3910.6 G-TX-RX-V.1 ; v2(3125,1395) 3220,1300 3493.15,1300 ; 4505,1300 4270.43,1534.57 4270.43,1594.57 HS_SPI_2.1 4720,2075 4720,2880 C11.1 4603.21,2996.79 4354.19,2996.79 U5.3 4325.67,2997.46 4325,2998.13 4325,3025.98 4320,3030.98 C12.2 4315,3105 4286,3134 4286,3140.77 3511.77,3915 G-TX-RX-V.1
  Bottom Layer w40: v3(2645,1604.72) 2779.72,1604.72 2845,1670 ; HS_SPI_4.1 2845,1670 ; v2(3125,1395) 3120,1395 2845,1670 ; 3493.15,1300 3493.15,1306.68 3561.9,1375.43 3616.47,1430 4366.65,1430 4496.65,1300 4505,1300
VCC5V: 3V-G-1.1-1.0-G-5V.1 C9.1 C10.1 G-5V.1 P8.1 R8.1 R24.1 U3.3 U5.1 | length 5045.8
  Top Layer w50: P8.1 G-5V.1 ; 3V-G-1.1-1.0-G-5V.1 3045,1540 v2(3125,1620) ; R24.1 3151.61,3740 G-5V.1 ; v2(3300,2830) 3300,3410 ; U5.1 4207.17,2670 ; C9.1 4476.1,2670 4207.17,2670 ; G-5V.1 3156.14,3625.47 3156.14,3623.86 3300,3480 3300,3410 ; 3300,3410 3415,3295 3845.71,3295 3975,3165.71 R8.1 C10.1 3980,2850 4030,2800 U3.3 4207.17,2670
  Bottom Layer w50: v2(3125,1620) 3125,2025 3395,2295 3395,2735 v2(3300,2830)
VCC7.4V: C3.2 C4.1 D2.1 L1.2 RP1.3 | length 2202.8
  Top Layer w50: L1.2 2821.81,1482.72 2907.85,1568.76 2908.76,1568.76 3630,2290 D2.1@4515,2290 ; D2.1 4581.42,2215 4640,2215 C3.2
VCCBAT: C1.1 C6.2 G.1 R4.1 S1.1 U2.7 | length 1217.6
  Top Layer w30: C1.1 1796.95,1396.95 1876.95,1396.95 2060.32,1580.32 2060.32,1586.38 2085,1611.06 2085,1615 2260,1440 G.1@2366.85,1440 ; S1.1@2085,1630 S1.1 ; U2.7 2348.88,1457.97 G.1@2366.85,1440 ; G.1 G.1@2366.85,1440
  Bottom Layer w30: C6.2 R4.1 2380,1446.85 G.1
pads on no net: "编码器1 T3.5" "编码器1 T3.6" "编码器2 T4.5" "编码器2 T4.6" RST.2 RST.3 S2.2 S2.3 S3.2 S3.3 S4.2 S4.3 U1.11 U1.19 U1.20 U1.24 U1.31 U1.32 U1.33 U1.40 U1.42 U1.43 U2.2 U2.3 U2.5 U5.4 UART_4.2 螺丝孔1.1 螺丝孔2.1 螺丝孔3.1 螺丝孔4.1 螺丝孔5.1 螺丝孔6.1

## Polygon pours and split planes (outlines as drawn)
GND on Bottom Layer "NONET_L-01_P-001" (solid, pour order 0): 1760,4085 4255,4085 4475,3865 4475,3325 4565,3235 5145,3235 5265,3115 5265,1210 5190,1135 1745,1135 1660,1220 1660,3985

## Other copper
Top Layer:
  region net GND: 2210,2095 2210,1860 1945,1860 1945,2095
  region net VCCBAT: 1915,1455 2025,1565 2025,1775 2160,1775 2160,1595 2265,1490 2455,1490 2455,1350 2290,1350 2170,1470 2045,1470 1915,1340 1735,1340 1735,1455
  region net NetS1_2: 1895,2105 1895,1870 1985,1780 1985,1570 1685,1570 1685,2105
  text "浙江工商大学" at 4535,1687.81 h149.61
  text "江心一号" at 4635,1542.34 h149.61
  text "2024/6/24" at 4610,1411.59 h149.61
Bottom Layer:
  region net GND: 2255,1330 2485,1330 2485,1195 2260,1195 2255,1200
  region net GND: 2195,2100 2195,1900 2005,1900 2005,2100
  region net VCCBAT: 2260,1635 2415,1635 2420,1630 2420,1380 2260,1380

## Silkscreen, mask and mechanical layers (free items; w line width, h text height)
Top Overlay:
  text "G-0.3-0.2-V" at 3063,4013 h35
  text "5.3-5.2-0.1" at 2611,3616 h25
  text "NC-0.7-G-4.5" at 2102,3538 h35 r90
  text "0.3-0.2-G--V" at 2357,3523 h35 r90
  text "3.5-3.3-3.4-3.2-G--V" at 2283,1958 h30
  text "2.2-2.4-2.3-2.5-G--V" at 3693,1513 h30
  text "V" at 2213,1463 h50
  text "3.6-G-1.3" at 3976,1416 h30
  text "5.1-G-2.6" at 3981,1366 h30
  text "V-1.6-NC" at 3146,1281 h30
  text "V-3.7-NC" at 4786,1281 h30
  text "G-0.6-NC" at 3141,1191 h30
  text "G-0.4-NC" at 4781,1176 h30
Mechanical 1:
  lines w10: 1647.96,1235 1650.21,3980 ; 1648,1234.93 ccw(c1755,1232.15) 1753.13,1125.13 ; 1650,3980.59 cw(c1769.5,3981.09) 1770,4100.59 ; 1755,1125 5450,1125 ; 1770,4100.69 4225,4099.63 ; 4225.85,4100.01 cw(c4227.5,3827.5) 4500,3830 4500,3395 ccw(c4652.5,3397.5) 4655,3245 4950,3245 5110,3245 cw(c5115,3075) 5285,3080 5285.14,1910 ; 5285,1910 ccw(c5430,1910) 5430,1765 cw(c5430,1650) 5545,1650 5545,1225 cw(c5442.5,1227.5) 5445,1125